# Altium PCB FlowPCB.PcbDoc
Units mil, origin at the board's own origin, x right, y up, seen from the top; angles counter-clockwise.
Board outline 2065 x 1130 mil, 2 copper layers (Top Layer, Bottom Layer); 5 components, 8 nets, 30 pads, 0 vias.
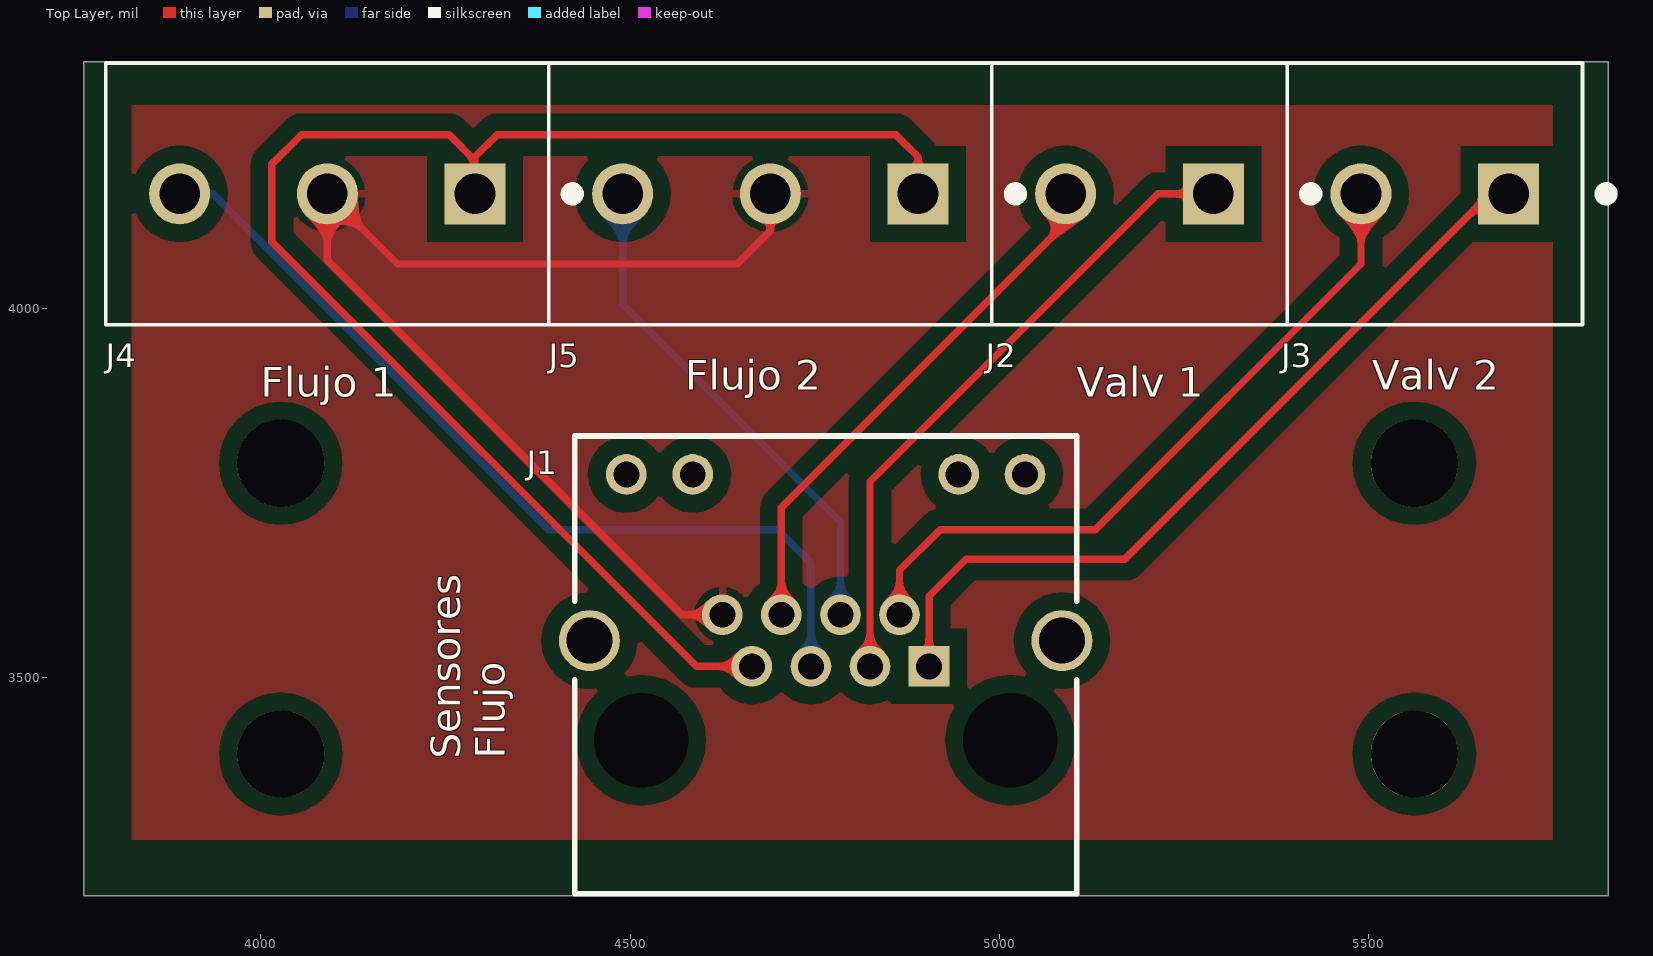
[diagram p0: Top Layer view]
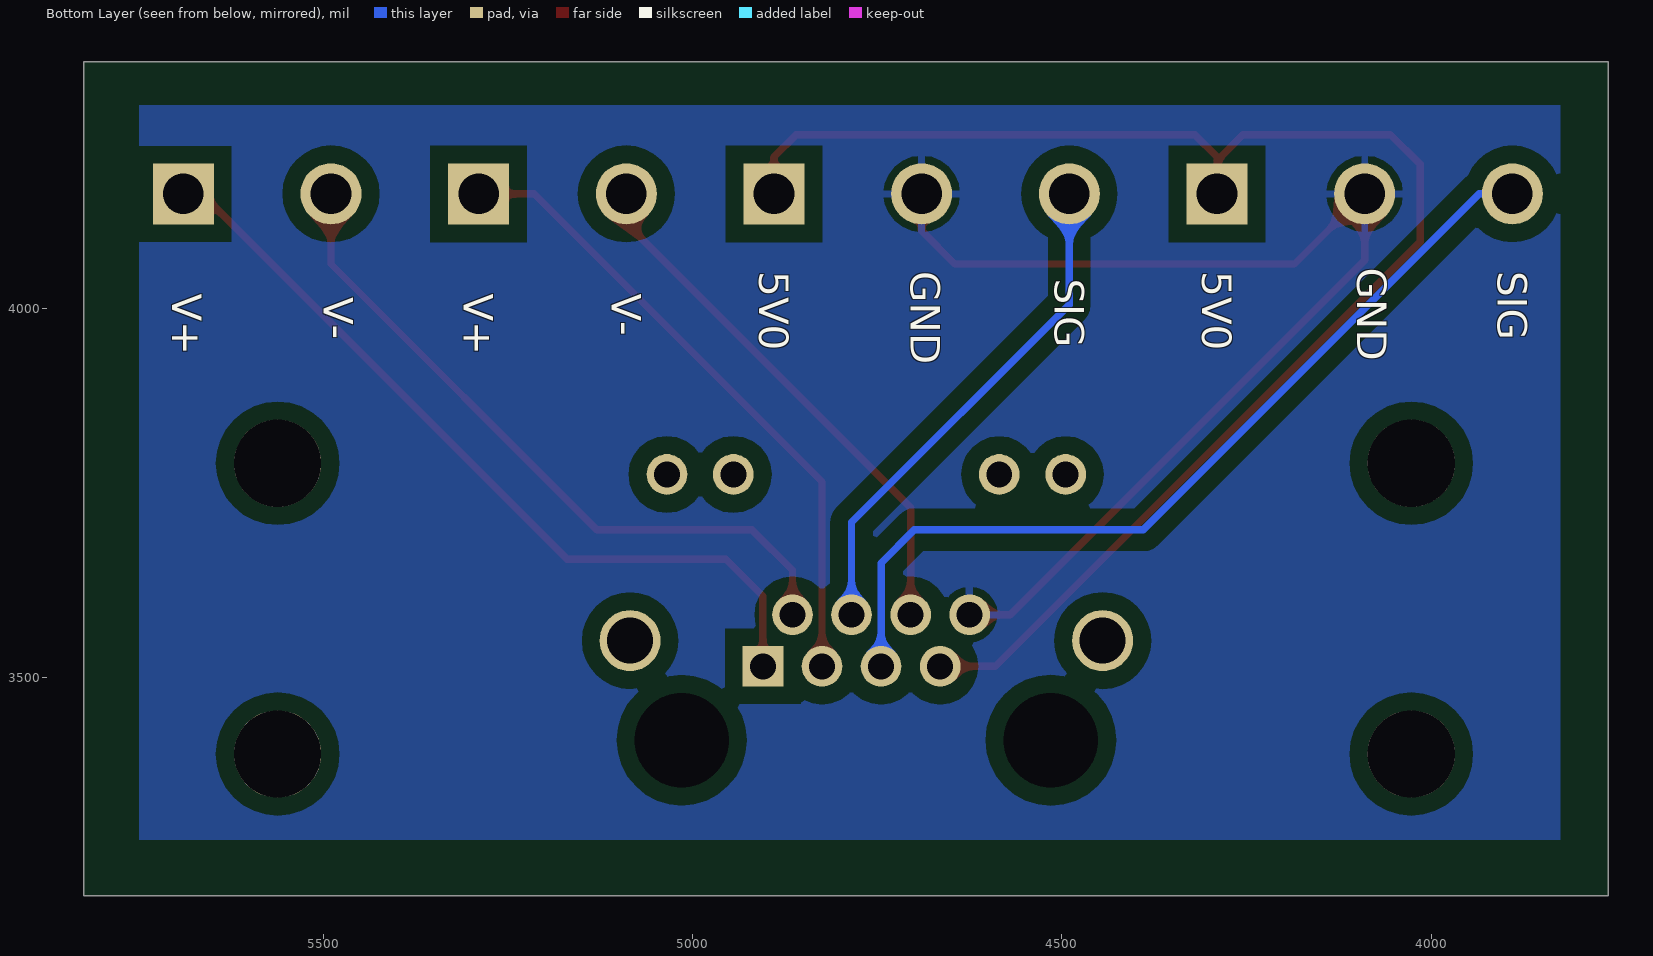
[diagram p1: Bottom Layer view, seen from below]
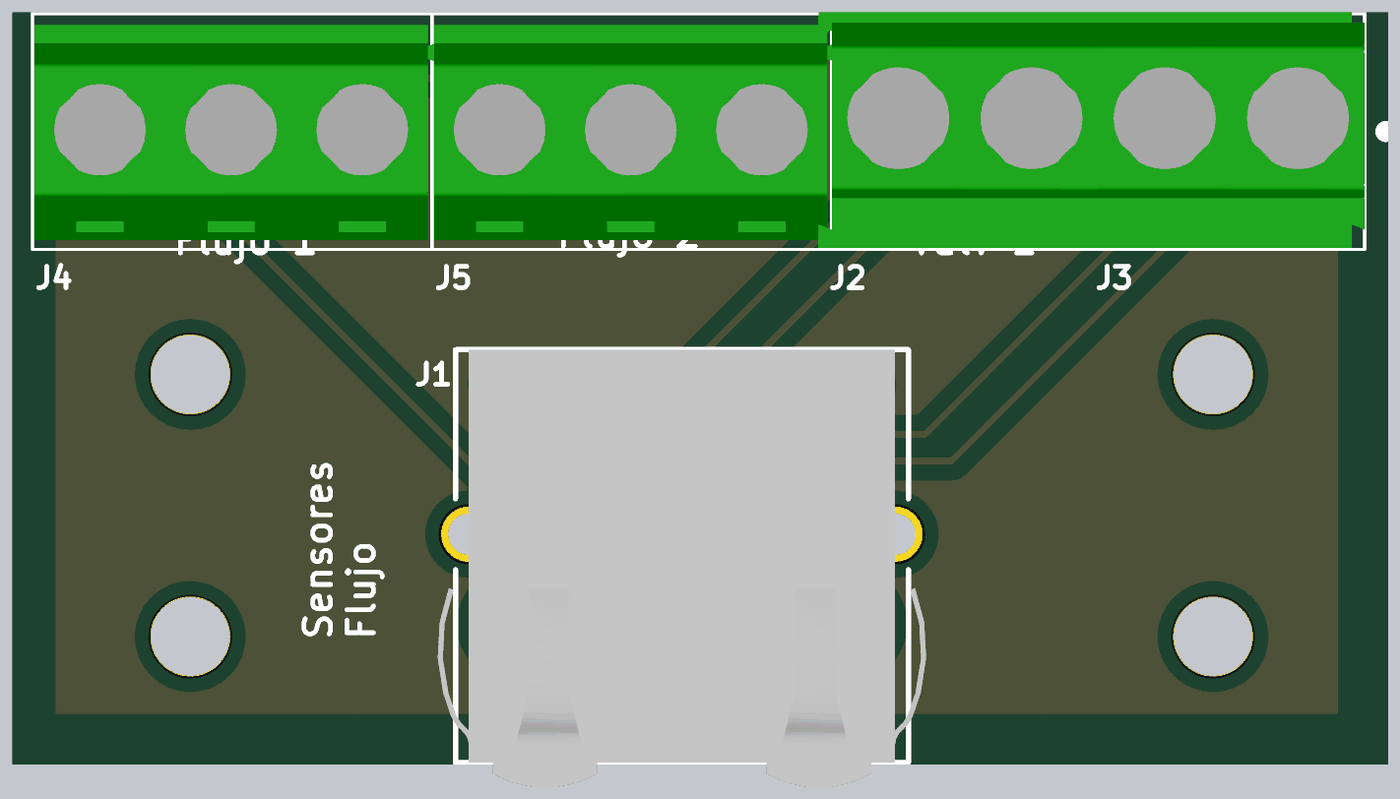
[diagram p2: 3D render of the assembled board from above, using the file's embedded part models]

## Layer stack, top to bottom
Top Solder: solder mask 0.4, Solder Resist, Dk 3.5
Top Layer: signal copper 1.4
Dielectric 1: dielectric 12.6, FR-4, Dk 4.8
Bottom Layer: signal copper 1.4
Bottom Solder: solder mask 0.4, Solder Resist, Dk 3.5

## Board outline
3760,3204.06 3760,4334.06 5825,4334.06 5825,3204.06

## Design rules (kind name [scope] priority, off if disabled: settings)
Clearance [All] p1: gap=6 except(24: Arc-Poly Track-Poly SMDPad-Poly THPad-Poly Via-Poly Fill-Poly Poly-Poly)
DiffPairsRouting [All] p1: maxlimit=10 minlimit=10 mostfreqgap=10 toplayer_minwidth=10 toplayer_maxwidth=15 toplayer_prefwidth=15 bottomlayer_minwidth=10 bottomlayer_maxwidth=15 bottomlayer_prefwidth=15 maxuncoupledlength=500
HoleSize [All] p1: absolutevalues=TRUE maxlimit=300 minlimit=1 maxpercent=80.000 minpercent=20.000
MinimumSolderMaskSliver [All] p1: minsoldermaskwidth=0
PlaneClearance [All] p1: clearance=32
PolygonConnect [All] p1: connectstyle=Relief reliefconductorwidth=10 reliefentries=4 polygonreliefangle="90 Angle" airgapwidth=10
RoutingTopology [All] p1: topology=Daisy_Simple
RoutingVias [All] p1: holewidth=28 width=50 viastyle="Through Hole" minholewidth=28 minwidth=50 maxholewidth=40 maxwidth=60
SilkToSilkClearance [All] p1: silktosilkclearance=0
SilkToSolderMaskClearance [IsPad] p1: minsilkscreentomaskgap=0 clearancetoexposedcopper=TRUE
SolderMaskExpansion SolderMaskExpansion_1 [IsVia] p1: expansion=0 soldermaskfromhole=TRUE
SolderMaskExpansion [All] p2: expansion=4
UnpouredPolygon [All] p1: allowunpoured=TRUE allowshelved=TRUE
Width [All] p1: maxlimit=40 minlimit=8 preferedwidth=16
22 further rules are at their usual default settings.

## Components (designator, comment, footprint, x,y, rotation, side; value= is the part's Value field where it differs from the comment)
J1 "2-406549-1" TECO-2-406549-1_V 4765,3550 r0 top
J2 "282841-2" TE_282841-2 5190,4155 r180 top
J3 "282841-2" TE_282841-2 5590,4155 r180 top
J4 "282841-3" TE_282841-3 4090,4155 r180 top
J5 "282841-3" TE_282841-3 4690,4155 r180 top

## Footprints (in the part's own frame and the unit in brackets; to place one, negate y for a bottom-side part, rotate by r counter-clockwise, add the part's x,y. Pads: shape width x height; smd on the part's side, far side on the other; paste and mask are expansions set on the pad)
TE_282841-2 [mm]
  rect 2.1x2.1 hole 1.4: 1(-2.54,0)
  round 2.1 hole 1.4: 2(2.54,0)
  silkscreen extent -6.09,-4.5 5.08,4.5, body extent -5.08,-4.55 5.58,4.45, height 15.21
TE_282841-3 [mm]
  rect 2.1x2.1 hole 1.4: 1(-5.08,0)
  round 2.1 hole 1.4: 2(0,0) 3(5.08,0)
  silkscreen extent -8.63,-4.5 7.62,4.5, body extent -8.05,-4.06 7.55,4.14, height 10.01
TECO-2-406549-1_V [mm] "Connector, 12-Leads, Body 17.27x15.75mm, Pitch 1.016mm"
  rect 1.4x1.4 hole 0.89: 1(3.556,-0.889)
  round 1.4 hole 0.89: 2(2.54,0.889) 3(1.524,-0.889) 4(0.508,0.889) 5(-0.508,-0.889) 6(-1.524,0.889) 7(-2.54,-0.889) 8(-3.556,0.889) 9(-4.572,5.715) 10(-6.858,5.715) 11(6.858,5.715) 12(4.572,5.715)
  round 0 hole 3.251 unplated: MH1(6.35,-3.429) MH2(-6.35,-3.429)
  round 2.1 hole 1.575: S1(8.128,0) S2(-8.128,0)
  silkscreen extent -8.63,-8.71 8.64,7.04, body extent -9.32,-9.68 9.32,7.04, height 14.61

## Part data
J1: library part CMP-2000-05541-1, "RJ45 Connector, Pitch 1.016 mm, 8 Position, Height 14.22 mm, Tail Length 3.18 mm, RoHS, Tray"
J2 J3: "Conn Terminal Block 2 POS 5.08mm Solder ST Thru-Hole 17.5A/Contact"
J4 J5: "Conn Terminal Block 3 POS 5.08mm Solder ST Thru-Hole 17.5A/Contact"

## Free pads (board coordinates)
  round 118.11 hole 118.11: ""(4026.89,3396.34) ""(4026.89,3790.04) ""(5562.32,3396.34) ""(5562.32,3790.04)

## Nets (pads, with @x,y where several pads share a name; then routed paths per layer and width w, separated by ;. In a path a pad name is that pad's centre, name@x,y a point inside that pad or via, vN(x,y) a via of type N, cw(c..) or ccw(c..) an arc to the next point about the centre after c; other vN are vias at no path point)
5V0: J1.7 J4.1 J5.1 | length 2024.1
  Top Layer w10: J4.1 4290,4200 ; J1.7 4590,3515 4015,4090 4015,4195 4055,4235 4255,4235 4290,4200 ; J5.1 4890,4205 4860,4235 4320,4235 4290,4205 4290,4200
GND: J1.8 J4.2 J5.2 | length 1531.8
  Top Layer w10: J1.8 4570,3585 4090,4065 J4.2 4185,4060 4645,4060 4690,4105 J5.2
HALL_E_1: J1.5 J4.3 | length 1202.1
  Bottom Layer w10: J4.3 3935,4155 4390,3700 4700,3700 4745,3655 J1.5
HALL_E_2: J1.4 J5.3 | length 692.2
  Bottom Layer w10: J5.3 4490,4005 4785,3710 J1.4
VALVE_N_1: J1.6 J2.2 | length 729.5
  Top Layer w10: J1.6 4705,3730 5090,4115 J2.2
VALVE_N_2: J1.2 J3.2 | length 951.9
  Top Layer w10: J1.2 4865,3645 4920,3700 5130,3700 5490,4060 J3.2
VALVE_P_1: J1.3 J2.1 | length 876.5
  Top Layer w10: J1.3 4825,3765 5215,4155 J2.1
VALVE_P_2: J1.1 J3.1 | length 1105.7
  Top Layer w10: J1.1 4905,3610 4955,3660 5170,3660 5665,4155 J3.1
pads on no net: J1.9 J1.10 J1.11 J1.12 J1.MH1 J1.MH2 J1.S1 J1.S2

## Polygon pours and split planes (outlines as drawn)
GND on Top Layer "GroundPlaneT" (solid, pour order 4): 3825,4275 3825,3280 4985,3280 5750,3280 5750,4275
GND on Bottom Layer "GroundPlaneT" (solid, pour order 6): 3825,4275 3825,3280 4985,3280 5750,3280 5750,4275

## Silkscreen, mask and mechanical layers (free items; w line width, h text height)
Top Overlay:
  text "Flujo 2" at 4575,3890 h40
  text "Valv 2" at 5505,3890 h40
  text "Flujo 1" at 4000,3880 h40
  text "Valv 1" at 5105,3880 h40
  text "Sensores / Flujo" at 4330,3390 h40 r90
Bottom Overlay:
  text "GND" at 4100,4055 h40 r90
  text "SIG" at 3910,4050 h40 r90
  text "5V0" at 4310,4050 h40 r90
  text "GND" at 4705,4050 h40 r90
  text "5V0" at 4910,4050 h40 r90
  text "SIG" at 4510,4040 h40 r90
  text "V-" at 5110,4020 h40 r90
  text "V+" at 5310,4020 h40 r90
  text "V+" at 5705,4020 h40 r90
  text "V-" at 5500,4015 h40 r90
Mechanical 1:
  the board outline again, w6

## Dimensions
3760,4334.06 to 5825,4334.06 on Mechanical 13
5825,4334.06 to 5825,3204.06 on Mechanical 13
4026.89,3396.34 to 3760,3204.06 on Mechanical 13
4026.89,3396.34 to 5562.32,3396.34 on Mechanical 13
4026.89,3396.34 to 3760,3204.06 on Mechanical 13
4026.89,3396.34 to 4026.89,3790.04 on Mechanical 13